# EAGLE board SamBreakOutSmall (EAGLE 8.2.2)
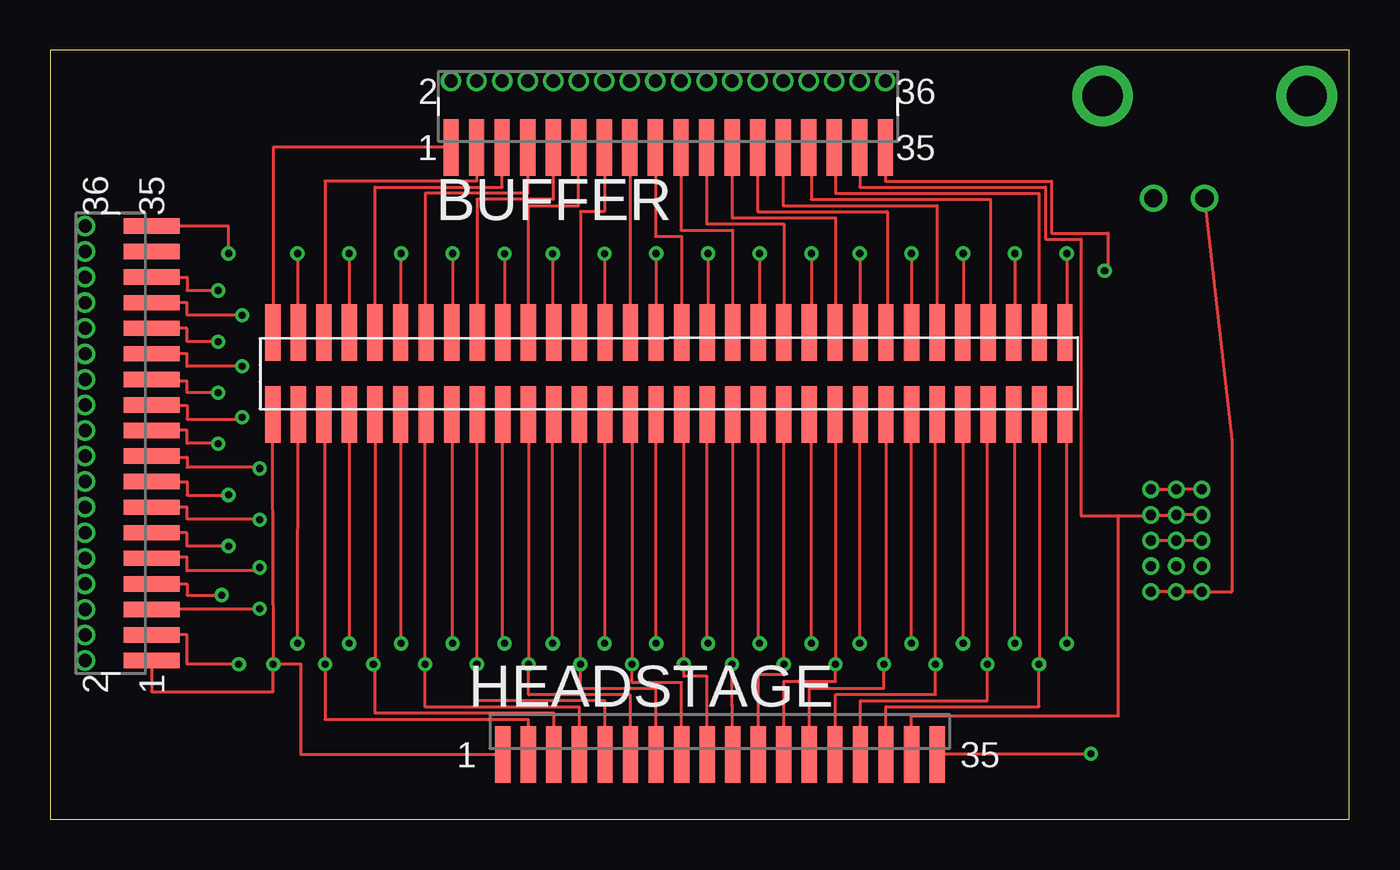
[diagram p0: board, top side]
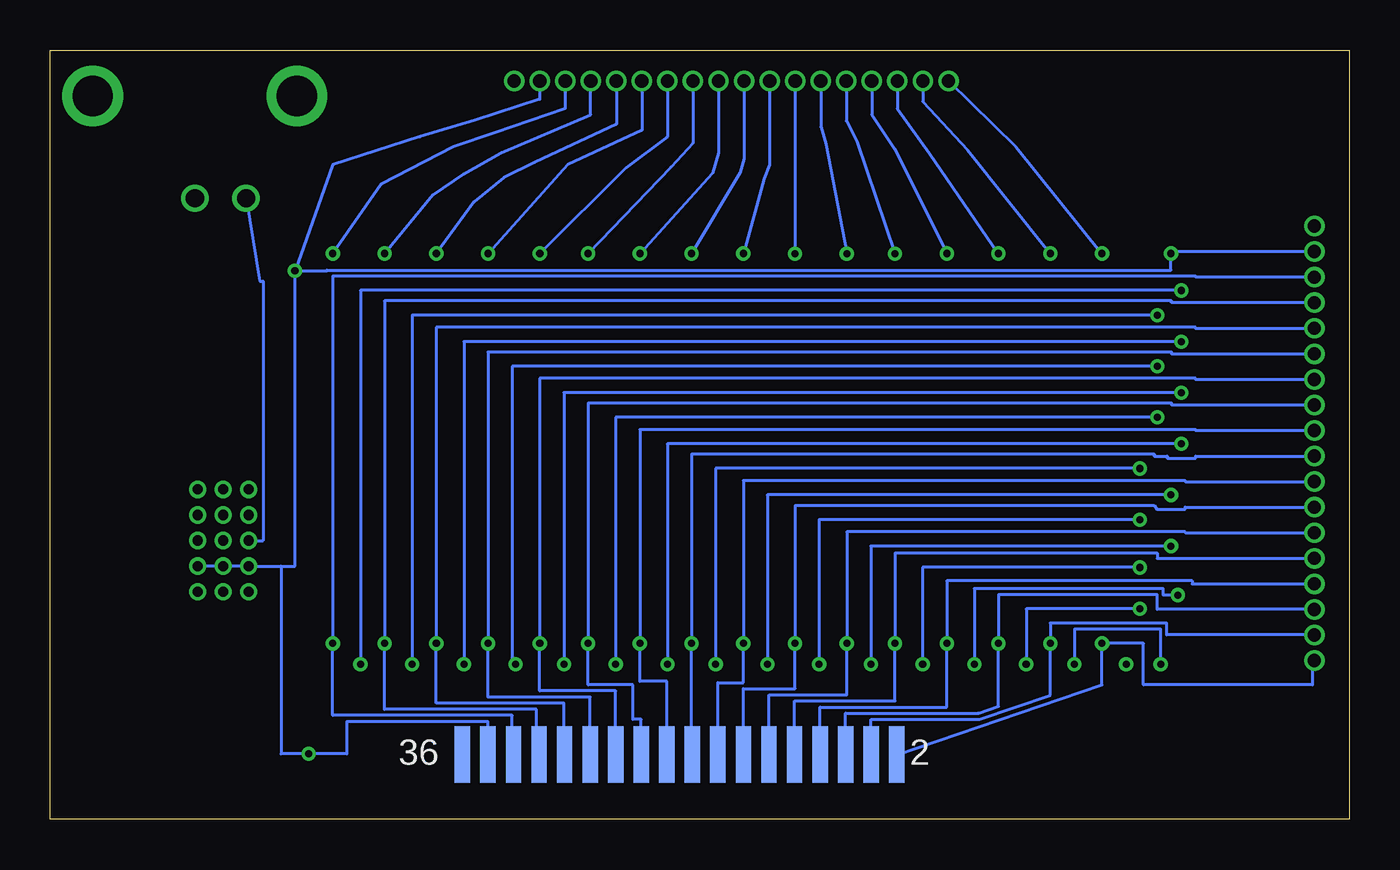
[diagram p1: board, bottom side, seen from below]

Size 64.57 x 38.21 mm. Coordinates in mm from the lower left corner, seen from the top.
Outline: 0,0 64.57,0 64.57,38.21 0,38.21 0,0
Copper layers (1*16): Top 0.0356mm / dielectric 1.5011mm / Bottom 0.0356mm
Design rules "oshpark-2layer": minimum track width 6mil, minimum drill 13mil, track to track 6mil, track to pad 6mil, pad to pad 6mil, via to via 6mil, smd to smd 6mil, copper to edge 15mil, drill to drill 6mil, minimum pad ring 7mil, minimum via ring 7mil, stop-mask expansion 2.5mil, vias tented up to drill 0mil, thermal gap 10mil

## Footprints (pad centres in the part's own frame; a part is rotated, then mirrored left to right if it is on the bottom)
FTSH-118-01-L-MT = smd 0.762 x 2.794: 1 -9.525,-2.032; 3 -8.255,-2.032; 5 -6.985,-2.032; 7 -5.715,-2.032; 9 -4.445,-2.032; 11 -3.175,-2.032; 13 -1.905,-2.032; 15 -0.635,-2.032; 17 0.635,-2.032; 19 1.905,-2.032; 21 3.175,-2.032; 23 4.445,-2.032; 25 5.715,-2.032; 27 6.985,-2.032; 29 8.255,-2.032; 31 9.525,-2.032; 33 10.795,-2.032; 35 12.065,-2.032 | drill 0.66: 2 -9.525,1.27; 4 -8.255,1.27; 6 -6.985,1.27; 8 -5.715,1.27; 10 -4.445,1.27; 12 -3.175,1.27; 14 -1.905,1.27; 16 -0.635,1.27; 18 0.635,1.27; 20 1.905,1.27; 22 3.175,1.27; 24 4.445,1.27; 26 5.715,1.27; 28 6.985,1.27; 30 8.255,1.27; 32 9.525,1.27; 34 10.795,1.27; 36 12.065,1.27
SFMC-118-L1-S-D = smd 0.762 x 2.794: 1 -10.795,-2.032; 3 -9.525,-2.032; 5 -8.255,-2.032; 7 -6.985,-2.032; 9 -5.715,-2.032; 11 -4.445,-2.032; 13 -3.175,-2.032; 15 -1.905,-2.032; 17 -0.635,-2.032; 19 0.635,-2.032; 21 1.905,-2.032; 23 3.175,-2.032; 25 4.445,-2.032; 27 5.715,-2.032; 29 6.985,-2.032; 31 8.255,-2.032; 33 9.525,-2.032; 35 10.795,-2.032 | smd 0.762 x 2.794 bottom: 2 -10.795,-2.032; 4 -9.525,-2.032; 6 -8.255,-2.032; 8 -6.985,-2.032; 10 -5.715,-2.032; 12 -4.445,-2.032; 14 -3.175,-2.032; 16 -1.905,-2.032; 18 -0.635,-2.032; 20 0.635,-2.032; 22 1.905,-2.032; 24 3.175,-2.032; 26 4.445,-2.032; 28 5.715,-2.032; 30 6.985,-2.032; 32 8.255,-2.032; 34 9.525,-2.032; 36 10.795,-2.032
BNCRAMOUNT = drill 0.9: 1.GND -2.54,0; 2.SIG 0,0 | drill 2.007: P$3 -5.08,5.08; P$4 5.08,5.08
FTSH-132-01-DV = smd 0.762 x 2.794: 1 -10.795,-2.032; 2 -10.795,2.032; 3 -9.525,-2.032; 4 -9.525,2.032; 5 -8.255,-2.032; 6 -8.255,2.032; 7 -6.985,-2.032; 8 -6.985,2.032; 9 -5.715,-2.032; 10 -5.715,2.032; 11 -4.445,-2.032; 12 -4.445,2.032; 13 -3.175,-2.032; 14 -3.175,2.032; 15 -1.905,-2.032; 16 -1.905,2.032; 17 -0.635,-2.032; 18 -0.635,2.032; 19 0.635,-2.032; 20 0.635,2.032; 21 1.905,-2.032; 22 1.905,2.032; 23 3.175,-2.032; 24 3.175,2.032; 25 4.445,-2.032; 26 4.445,2.032; 27 5.715,-2.032; 28 5.715,2.032; 29 6.985,-2.032; 30 6.985,2.032; 31 8.255,-2.032; 32 8.255,2.032; 33 9.525,-2.032; 34 9.525,2.032; 35 10.795,-2.032; 36 10.795,2.032; 37 12.065,-2.032; 38 12.065,2.032; 39 13.335,-2.032; 40 13.335,2.032; 41 14.605,-2.032; 42 14.605,2.032; 43 15.875,-2.032; 44 15.875,2.032; 45 17.145,-2.032; 46 17.145,2.032; 47 18.415,-2.032; 48 18.415,2.032; 49 19.685,-2.032; 50 19.685,2.032; 51 20.955,-2.032; 52 20.955,2.032; 53 22.225,-2.032; 54 22.225,2.032; 55 23.495,-2.032; 56 23.495,2.032; 57 24.765,-2.032; 58 24.765,2.032; 59 26.035,-2.032; 60 26.035,2.032; 61 27.305,-2.032; 62 27.305,2.032; 63 28.575,-2.032; 64 28.575,2.032
LPPB051NFFN-RC = drill 0.5: P$1 0,0; P$2 -1.27,0; P$3 -2.54,0; P$4 -3.81,0; P$5 -5.08,0

## Placement (x,y rotation side)
BUFFER  FTSH-118-01-L-MTREGULAR  [FTSH-118-01-L-MT]  29.44,35.42 0 top
HEADSTAGE  SFMC-118-L1-S-D  [SFMC-118-L1-S-D]  33.29,5.25 0 top
STIM  FTSH-118-01-L-MTREGULAR  [FTSH-118-01-L-MT]  3,17.42 90 top
U$1  BNCRAMOUNT  [BNCRAMOUNT]  57.38,30.86 0 top
U$3  FTSH-132-01-L-DV  [FTSH-132-01-DV]  21.86,22.16 0 top
U$34  LPPB051NFFN-RC  [LPPB051NFFN-RC]  55.98,16.4 90 top
U$35  LPPB051NFFN-RC  [LPPB051NFFN-RC]  54.71,16.4 90 top
U$36  LPPB051NFFN-RC  [LPPB051NFFN-RC]  57.25,16.4 90 top

## Library data of the parts
BUFFER HEADSTAGE STIM U$3 = tuckerLib2
U$1 = sam
U$34-U$36 = Sombeck_lib

## Nets
0V: BUFFER.33 HEADSTAGE.33 U$34.P$2 U$35.P$2 U$36.P$2
GND: BUFFER.34 BUFFER.35 HEADSTAGE.34 HEADSTAGE.35 STIM.34 STIM.35 U$34.P$4 U$35.P$4 U$36.P$4
N$1: BUFFER.1 U$3.2
N$2: BUFFER.29 U$3.58
N$3: BUFFER.3 U$3.6
N$4: BUFFER.2 U$3.4
N$5: BUFFER.5 U$3.10
N$6: BUFFER.7 U$3.14
N$7: BUFFER.9 U$3.18
N$8: BUFFER.11 U$3.22
N$9: BUFFER.13 U$3.26
N$10: BUFFER.15 U$3.30
N$11: BUFFER.17 U$3.34
N$12: BUFFER.19 U$3.38
N$13: BUFFER.27 U$3.54
N$14: BUFFER.23 U$3.46
N$15: BUFFER.25 U$3.50
N$16: BUFFER.4 U$3.8
N$17: BUFFER.6 U$3.12
N$18: BUFFER.31 U$3.62
N$19: BUFFER.8 U$3.16
N$20: BUFFER.10 U$3.20
N$21: BUFFER.12 U$3.24
N$22: BUFFER.14 U$3.28
N$23: BUFFER.16 U$3.32
N$24: BUFFER.18 U$3.36
N$25: BUFFER.20 U$3.40
N$26: BUFFER.21 U$3.42
N$27: BUFFER.22 U$3.44
N$28: BUFFER.24 U$3.48
N$29: BUFFER.26 U$3.52
N$30: BUFFER.28 U$3.56
N$31: BUFFER.30 U$3.60
N$32: BUFFER.32 U$3.64
N$34: HEADSTAGE.3 STIM.3 U$3.5
N$35: HEADSTAGE.5 STIM.5 U$3.9
N$36: HEADSTAGE.7 STIM.7 U$3.13
N$37: HEADSTAGE.9 STIM.9 U$3.17
N$38: HEADSTAGE.11 STIM.11 U$3.21
N$39: HEADSTAGE.13 STIM.13 U$3.25
N$40: HEADSTAGE.15 STIM.15 U$3.29
N$41: HEADSTAGE.17 STIM.17 U$3.33
N$42: HEADSTAGE.19 STIM.19 U$3.37
N$43: HEADSTAGE.21 STIM.21 U$3.41
N$44: HEADSTAGE.23 STIM.23 U$3.45
N$45: HEADSTAGE.25 STIM.25 U$3.49
N$46: HEADSTAGE.27 STIM.27 U$3.53
N$47: HEADSTAGE.29 STIM.29 U$3.57
N$48: HEADSTAGE.31 STIM.31 U$3.61
N$49: HEADSTAGE.2 STIM.2 U$3.3
N$50: HEADSTAGE.4 STIM.4 U$3.7
N$51: HEADSTAGE.6 STIM.6 U$3.11
N$52: HEADSTAGE.8 STIM.8 U$3.15
N$53: HEADSTAGE.10 STIM.10 U$3.19
N$54: HEADSTAGE.12 STIM.12 U$3.23
N$55: HEADSTAGE.14 STIM.14 U$3.27
N$56: HEADSTAGE.16 STIM.16 U$3.31
N$57: HEADSTAGE.18 STIM.18 U$3.35
N$58: HEADSTAGE.20 STIM.20 U$3.39
N$59: HEADSTAGE.22 STIM.22 U$3.43
N$60: HEADSTAGE.24 STIM.24 U$3.47
N$61: HEADSTAGE.26 STIM.26 U$3.51
N$62: HEADSTAGE.28 STIM.28 U$3.55
N$63: HEADSTAGE.30 STIM.30 U$3.59
N$64: HEADSTAGE.32 STIM.32 U$3.63
N$65: HEADSTAGE.1 STIM.1 U$3.1
N$97: U$1.1.GND U$34.P$3 U$35.P$3 U$36.P$3
N$98: U$34.P$1 U$35.P$1 U$36.P$1
N$99: U$1.2.SIG U$34.P$5 U$35.P$5 U$36.P$5

## Tracks (layer width: path | path; a pad name or v marks a point on that pad's centre or on a via)
0V
  Top 0.152: HEADSTAGE.33 42.81,5.14 53.09,5.14 53.09,15.09 | BUFFER.33 40.24,31.41 49.47,31.41 49.47,28.83 51.23,28.83 51.23,15.09 53.09,15.09 | 53.09,15.09 54.7,15.09 | 54.7,15.09 U$35.P$2 | 54.7,15.09 55.98,15.09 U$34.P$2 U$36.P$2
GND  (via drill 0.35)
  Top 0.152: BUFFER.35 41.51,31.72 49.77,31.72 49.77,29.13 52.58,29.13 52.58,27.26 v52.41,27.26 | v8.86,28.12 8.86,29.48 STIM.35 | HEADSTAGE.35 44.08,3.26 v51.72,3.26
  Bottom 0.152: HEADSTAGE.34 42.81,4.86 49.84,4.86 49.84,3.26 v51.72,3.26 53.09,3.26 53.09,12.59 | BUFFER.34 40.24,35.78 43.45,34.75 46.2,33.91 50.52,32.54 v52.41,27.26 | U$36.P$4 U$34.P$4 U$35.P$4 53.09,12.59 | v52.41,27.26 50.82,27.26 50.82,27.29 8.86,27.29 v8.86,28.12 8.86,28.21 STIM.34 | 53.09,12.59 52.41,12.59 v52.41,27.26
N$1
  Top 0.152: BUFFER.1 11.09,33.39 11.09,24.19 U$3.2
N$2
  Top 0.152: U$3.58 46.75,24.19 46.75,30.8 37.83,30.8 37.83,33.39 BUFFER.29
N$3
  Top 0.152: BUFFER.3 21.19,31.72 13.66,31.72 13.66,24.19 U$3.6
N$4  (via drill 0.35)
  Top 0.152: v12.29,28.12 12.29,24.19 U$3.4
  Bottom 0.152: BUFFER.2 16.57,33.43 v12.29,28.12
N$5
  Top 0.152: U$3.10 16.14,31.41 22.46,31.41 BUFFER.5
N$6
  Top 0.152: BUFFER.7 23.73,31.11 18.63,31.11 18.63,24.19 U$3.14
N$7
  Top 0.152: BUFFER.9 25,30.8 21.2,30.8 21.2,24.19 U$3.18
N$8
  Top 0.152: BUFFER.11 26.27,30.5 23.76,30.5 U$3.22
N$9
  Top 0.152: BUFFER.13 27.54,30.19 26.35,30.19 26.35,24.19 U$3.26
N$10
  Top 0.152: BUFFER.15 28.81,24.19 U$3.30
N$11
  Top 0.152: U$3.34 31.38,28.98 30.08,28.98 BUFFER.17
N$12
  Top 0.152: BUFFER.19 31.35,29.28 33.92,29.28 U$3.38
N$13
  Top 0.152: U$3.54 44.08,30.5 36.43,30.5 BUFFER.27
N$14
  Top 0.152: U$3.46 39.03,24.19 39.03,29.89 33.89,29.89 BUFFER.23
N$15
  Top 0.152: U$3.50 41.6,24.19 41.6,30.19 35.16,30.19 BUFFER.25
N$16  (via drill 0.35)
  Top 0.152: v14.86,28.12 14.86,24.19 U$3.8
  Bottom 0.152: BUFFER.4 21.19,35.66 18.97,33.26 v14.86,28.12
N$17  (via drill 0.35)
  Top 0.152: U$3.12 17.43,24.19 v17.43,28.12
  Bottom 0.152: BUFFER.6 22.46,35.32 20.86,33.09 v17.43,28.12
N$18
  Top 0.152: U$3.62 49.16,31.11 39.03,31.11 39.03,33.39 BUFFER.31
N$19  (via drill 0.35)
  Top 0.152: v20,28.12 20,24.19 U$3.16
  Bottom 0.152: BUFFER.8 23.73,35.01 22.57,33.3 v20,28.12
N$20  (via drill 0.35)
  Top 0.152: v22.57,28.11 22.57,24.19 U$3.20
  Bottom 0.152: BUFFER.10 25,34.71 24.46,33.68 v22.57,28.11
N$21  (via drill 0.35)
  Top 0.152: v24.97,28.11 24.97,24.19 U$3.24
  Bottom 0.152: BUFFER.12 26.27,34.4 26,33.55 v24.97,28.11
N$22  (via drill 0.35)
  Top 0.152: v27.55,28.11 27.55,24.19 U$3.28
  Bottom 0.152: BUFFER.14 27.54,29.83 27.55,29.83 v27.55,28.11
N$23  (via drill 0.35)
  Top 0.152: v30.12,28.12 U$3.32
  Bottom 0.152: BUFFER.16 28.81,32.52 29.09,31.83 v30.12,28.12
N$24  (via drill 0.35)
  Top 0.152: v32.69,28.12 32.69,24.19 U$3.36
  Bottom 0.152: BUFFER.18 30.08,32.82 30.29,32.14 v32.69,28.12
N$25  (via drill 0.35)
  Top 0.152: v35.26,28.12 35.26,24.19 U$3.40
  Bottom 0.152: BUFFER.20 31.35,33.13 31.66,32.1 v35.26,28.12
N$26
  Top 0.152: BUFFER.21 32.62,29.58 36.46,29.58 U$3.42
N$27  (via drill 0.35)
  Top 0.152: v37.83,28.12 37.83,24.19 U$3.44
  Bottom 0.152: BUFFER.22 32.62,33.6 33.72,32.4 v37.83,28.12
N$28  (via drill 0.35)
  Top 0.152: v40.23,28.12 40.23,24.19 U$3.48
  Bottom 0.152: BUFFER.24 33.89,33.93 35.95,32.39 v40.23,28.12
N$29  (via drill 0.35)
  Top 0.152: v42.8,28.12 v42.81,28.12 U$3.52
  Bottom 0.152: BUFFER.26 35.16,34.23 38.86,32.52 v42.8,28.12
N$30  (via drill 0.35)
  Top 0.152: v45.38,28.12 45.38,24.19 U$3.56
  Bottom 0.152: v45.38,28.12 43.49,30.69 42.02,31.89 40.48,32.65 36.43,34.54 BUFFER.28
N$31  (via drill 0.35)
  Top 0.152: v47.95,28.12 47.95,24.19 U$3.60
  Bottom 0.152: v47.95,28.12 45.55,31.03 44.04,32.06 42.16,33.13 37.7,35.01 BUFFER.30
N$32  (via drill 0.35)
  Top 0.152: v50.52,28.12 50.52,24.19 U$3.64
  Bottom 0.152: BUFFER.32 38.97,35.32 42.46,34.12 44.52,33.43 48.12,31.55 v50.52,28.12
N$34  (via drill 0.35)
  Top 0.152: HEADSTAGE.3 23.76,4.97 13.66,4.97 v13.66,7.72 13.66,20.12 U$3.5 | STIM.3 6.8,9.16 6.8,7.72 v9.37,7.72
  Bottom 0.152: v9.37,7.72 9.37,9.45 13.66,9.45 v13.66,7.72
N$35  (via drill 0.35)
  Top 0.152: HEADSTAGE.5 25.03,5.28 18.94,5.28 | U$3.9 16.14,7.8 v16.06,7.72 16.14,7.63 16.14,5.28 18.94,5.28 | v10.4,10.46 7.32,10.46 7.32,10.43 STIM.5 | 18.94,5.28
  Bottom 0.152: v10.4,10.46 16.06,10.46 v16.06,7.72
N$36  (via drill 0.35)
  Top 0.152: HEADSTAGE.7 26.3,5.58 19.96,5.58 | 19.96,5.58 | U$3.13 18.63,20.12 v18.63,7.72 18.63,5.58 19.96,5.58 | STIM.7 6.8,11.7 6.8,11.14 v8.52,11.14
  Bottom 0.152: v8.52,11.14 9.24,11.14 9.24,11.47 18.63,11.47 v18.63,7.72
N$37  (via drill 0.35)
  Top 0.152: HEADSTAGE.9 27.57,5.89 21.2,5.89 v21.2,7.72 21.2,20.12 U$3.17 | v10.4,12.52 10.4,12.34 6.8,12.34 6.8,13.03 5.04,13.03 STIM.9
  Bottom 0.152: v10.4,12.52 21.2,12.52 v21.2,7.72
N$38  (via drill 0.35)
  Top 0.152: HEADSTAGE.11 28.84,6.19 23.77,6.19 v23.77,7.72 23.76,7.72 U$3.21 | STIM.11 6.8,14.23 6.8,13.58 v8.86,13.58
  Bottom 0.152: v8.86,13.58 23.77,13.58 v23.77,7.72
N$39  (via drill 0.35)
  Top 0.152: HEADSTAGE.13 30.11,6.5 26.35,6.5 v26.35,7.72 26.35,20.12 U$3.25 | v10.4,14.9 10.4,14.92 6.8,14.92 6.8,15.51 STIM.13
  Bottom 0.152: v10.4,14.9 26.35,14.9 v26.35,7.72
N$40  (via drill 0.35)
  Top 0.152: HEADSTAGE.15 31.38,6.8 28.92,6.8 v28.92,7.72 28.92,20.12 U$3.29 | STIM.15 6.8,16.78 6.8,16.12 v8.86,16.12
  Bottom 0.152: v8.86,16.12 28.92,16.12 v28.92,7.72
N$41  (via drill 0.35)
  Top 0.152: HEADSTAGE.17 32.65,7.11 31.49,7.11 v31.49,7.72 31.49,20.12 U$3.33 | v10.4,17.44 10.4,17.49 6.8,17.49 6.8,18 5.04,18 STIM.17
  Bottom 0.152: v10.4,17.44 31.49,17.44 v31.49,7.72
N$42  (via drill 0.35)
  Top 0.152: HEADSTAGE.19 33.92,5.66 33.89,5.66 v33.89,7.72 33.92,7.72 U$3.37 | v8.34,18.66 8.34,18.69 6.8,18.69 6.8,19.32 STIM.19
  Bottom 0.152: v8.34,18.66 33.89,18.66 v33.89,7.72
N$43  (via drill 0.35)
  Top 0.152: HEADSTAGE.21 35.19,7.2 36.46,7.2 v36.46,7.72 U$3.41 | STIM.21 5.04,20.57 6.8,20.57 6.8,19.89 9.54,19.89 v9.54,19.98
  Bottom 0.152: v9.54,19.98 36.46,19.98 v36.46,7.72
N$44  (via drill 0.35)
  Top 0.152: HEADSTAGE.23 36.46,6.86 39.03,6.86 v39.03,7.72 39.03,20.12 U$3.45 | v8.34,21.2 6.8,21.2 6.8,21.77 5.04,21.77 STIM.23
  Bottom 0.152: v8.34,21.2 39.03,21.2 v39.03,7.72
N$45  (via drill 0.35)
  Top 0.152: HEADSTAGE.25 37.73,6.52 41.43,6.52 v41.43,7.72 41.54,7.72 U$3.49 | v9.54,22.52 6.8,22.52 6.8,23.15 5.04,23.15 STIM.25
  Bottom 0.152: v41.43,7.72 41.6,7.72 41.6,22.52 v9.54,22.52
N$46  (via drill 0.35)
  Top 0.152: HEADSTAGE.27 39.03,3.22 39.03,6.21 44,6.21 v44,7.72 44,20.12 U$3.53 | v8.34,23.74 6.8,23.74 6.8,24.4 STIM.27
  Bottom 0.152: v8.34,23.74 44,23.74 v44,7.72
N$47  (via drill 0.35)
  Top 0.152: HEADSTAGE.29 40.27,5.91 46.58,5.91 v46.58,7.72 46.58,20.12 U$3.57 | v9.54,25.06 6.8,25.06 6.8,25.67 STIM.29
  Bottom 0.152: v9.54,25.06 46.58,25.06 v46.58,7.72
N$48  (via drill 0.35)
  Top 0.152: HEADSTAGE.31 41.54,5.6 49.15,5.6 49.15,7.37 | 49.15,7.37 v49.15,7.72 | STIM.31 6.8,26.94 6.8,26.28 v8.34,26.28 | U$3.61 49.16,7.37 49.15,7.37
  Bottom 0.152: v8.34,26.28 49.15,26.28 v49.15,7.72
N$49  (via drill 0.35)
  Top 0.152: v12.29,8.74 U$3.3
  Bottom 0.152: HEADSTAGE.2 12.29,6.69 v12.29,8.74 10.23,8.74 10.23,6.69 1.83,6.69 1.83,7.89 STIM.2
N$50  (via drill 0.35)
  Top 0.152: v14.86,8.74 14.87,8.74 U$3.7
  Bottom 0.152: HEADSTAGE.4 23.76,4.97 18.39,4.97 14.86,6.17 v14.86,8.74 14.86,9.76 9.07,9.76 9.07,9.16 STIM.4
N$51  (via drill 0.35)
  Top 0.152: v17.43,8.74 17.43,20.12 U$3.11
  Bottom 0.152: HEADSTAGE.6 25.03,5.28 18.44,5.28 17.43,5.62 v17.43,8.74 17.43,11.17 9.54,11.17 9.54,10.43 STIM.6
N$52  (via drill 0.35)
  Top 0.152: v20,8.74 20,20.12 U$3.15
  Bottom 0.152: HEADSTAGE.8 26.3,5.58 20,5.58 v20,8.74 20,11.85 7.81,11.85 7.81,11.7 STIM.8
N$53  (via drill 0.35)
  Top 0.152: v22.57,8.74 22.49,8.74 U$3.19
  Bottom 0.152: HEADSTAGE.10 27.57,5.89 22.57,5.89 v22.57,8.74 22.57,13.22 9.54,13.22 9.54,12.97 STIM.10
N$54  (via drill 0.35)
  Top 0.152: v24.97,8.74 24.97,20.12 U$3.23
  Bottom 0.152: HEADSTAGE.12 28.84,6.19 24.97,6.19 v24.97,8.74 24.97,14.29 8.15,14.29 8.15,14.24 STIM.12
N$55  (via drill 0.35)
  Top 0.152: v27.55,8.74 27.57,8.74 U$3.27
  Bottom 0.152: HEADSTAGE.14 30.11,6.5 27.55,6.5 v27.55,8.74 27.55,15.6 9.69,15.6 9.57,15.41 8.15,15.41 8.15,15.51 STIM.14
N$56  (via drill 0.35)
  Top 0.152: v30.12,8.74 v30.11,8.74 U$3.31
  Bottom 0.152: HEADSTAGE.16 31.38,6.8 30.12,6.8 v30.12,8.74 30.12,16.83 8.15,16.83 8.15,16.78 STIM.16
N$57  (via drill 0.35)
  Top 0.152: v32.69,8.74 32.65,8.74 U$3.35
  Bottom 0.152: HEADSTAGE.18 32.69,3.22 v32.69,8.74 32.69,18.14 9.69,18.14 9.69,18.05 9.05,18.05 9.05,17.95 7.63,17.95 7.63,18.05 STIM.18
N$58  (via drill 0.35)
  Top 0.152: v35.26,8.74 35.19,8.74 U$3.39
  Bottom 0.152: HEADSTAGE.20 33.92,6.86 35.26,6.86 v35.26,8.74 35.26,19.37 7.63,19.37 7.63,19.32 STIM.20
N$59  (via drill 0.35)
  Top 0.152: v37.83,8.74 37.83,20.12 U$3.43
  Bottom 0.152: HEADSTAGE.22 35.19,4.97 35.6,4.97 35.6,6.69 37.83,6.69 v37.83,8.74 37.83,20.68 8.84,20.68 8.84,20.59 STIM.22
N$60  (via drill 0.35)
  Top 0.152: v40.23,8.74 40.23,20.12 U$3.47
  Bottom 0.152: HEADSTAGE.24 36.46,6.38 40.23,6.38 v40.23,8.74 40.23,21.91 7.63,21.91 7.63,21.86 STIM.24
N$61  (via drill 0.35)
  Top 0.152: v42.8,8.74 v42.81,8.74 U$3.51
  Bottom 0.152: HEADSTAGE.26 37.73,6.08 42.8,6.08 v42.8,8.74 42.8,23.22 8.84,23.22 8.84,23.13 STIM.26
N$62  (via drill 0.35)
  Top 0.152: v45.38,8.74 45.38,20.12 U$3.55
  Bottom 0.152: HEADSTAGE.28 39.03,3.22 39.03,5.77 45.38,5.77 v45.38,8.74 45.38,24.45 7.63,24.45 7.63,24.4 STIM.28
N$63  (via drill 0.35)
  Top 0.152: v47.95,8.74 47.95,20.12 U$3.59
  Bottom 0.152: HEADSTAGE.30 40.41,3.22 40.41,5.47 47.95,5.47 v47.95,8.74 47.95,25.76 8.84,25.76 8.84,25.67 STIM.30
N$64  (via drill 0.35)
  Top 0.152: v50.52,8.74 50.52,20.12 U$3.63
  Bottom 0.152: HEADSTAGE.32 41.6,3.22 41.6,5.16 50.52,5.16 v50.52,8.74 50.52,26.99 7.63,26.99 7.63,26.94 STIM.32
N$65  (via drill 0.35)
  Top 0.152: U$3.1 11.07,10.65 11.09,10.63 v11.09,7.72 | v11.09,7.72 11.09,6.34 5.04,6.34 STIM.1 | HEADSTAGE.1 12.46,3.22 12.46,7.72 v11.09,7.72
N$97
  Top 0.152: U$35.P$3 U$34.P$3 U$36.P$3
  Bottom 0.152: U$35.P$3 53.98,13.86 53.98,26.75 54.15,26.75 U$1.1.GND
N$98
  Top 0.152: U$36.P$1 U$34.P$1 U$35.P$1
N$99
  Top 0.152: U$36.P$5 U$35.P$5 | U$34.P$5 U$36.P$5 | U$36.P$5 58.75,11.32 58.75,18.86 U$1.2.SIG